# Altium PCB Thruster Driver Board.PcbDoc (part 2 of 2)
Units mil, origin at the board's own origin, x right, y up, seen from the top; angles counter-clockwise.
Board outline 7035 x 3025 mil, 4 copper layers (Top Layer, Ground Plane, Power Plane, Bottom Layer); 146 components, 107 nets, 533 pads, 443 vias.
Unrouted connection lines stored in the file: 1.
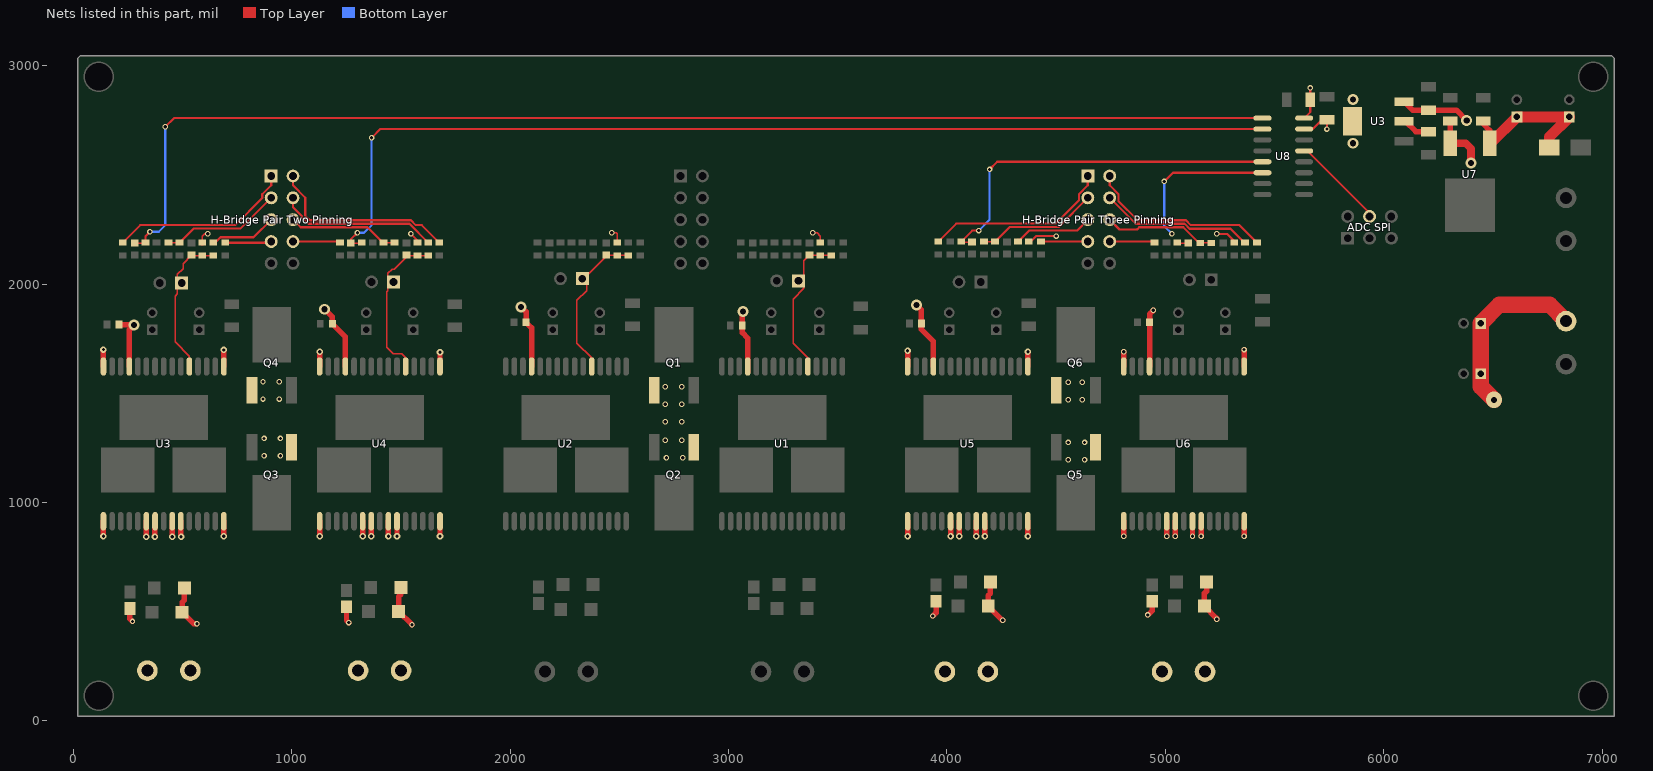
[diagram p4: the nets of this part, all layers, seen from the top]

## Via types
v1: diameter 25, hole 15, Top Layer to Bottom Layer, 371 vias
v2: diameter 30, hole 15, Top Layer to Bottom Layer, 45 vias
v3: diameter 50, hole 28, Top Layer to Bottom Layer, 26 vias
v4: diameter 75, hole 28, Top Layer to Bottom Layer, 1 vias

## Nets (pads, with @x,y where several pads share a name; then routed paths per layer and width w, separated by ;. In a path a pad name is that pad's centre, name@x,y a point inside that pad or via, vN(x,y) a via of type N, cw(c..) or ccw(c..) an arc to the next point about the centre after c; other vN are vias at no path point) (continued)
P2_M1_CURRENT_SENSE: C10.2 R24.1 U8.1 | length 5683.1
  Top Layer w6: C10.2@280,2187.56 328.03,2187.56 R24.1@330,2189.53
  Top Layer w10: R24.1@330,2189.53 330,2220 v1(350,2240) ; v1(420,2720) 460,2760 U8.1@5444.53,2760
  Bottom Layer w10: v1(350,2240) 390,2240 420,2270 v1(420,2720)
P2_M1ENA/B: "H-Bridge Pair Two Pinning.5" R20.1 | length 308.7
  Top Layer w10: R20.1@640,2189.53 647.95,2189.53 672.73,2214.31 824.31,2214.31 905,2295
P2_M1INA: "H-Bridge Pair Two Pinning.7" R21.1 | length 212.3
  Top Layer w10: R21.1@695,2189.53 899.53,2189.53 905,2195
P2_M1INB: "H-Bridge Pair Two Pinning.1" R22.1 | length 841.7
  Top Layer w10: R22.1@225,2189.53 305.47,2270 740,2270 864.47,2394.47 864.47,2411.79 905,2452.31 905,2495
P2_M1OUTA: D5.2 D6.1 J8.1 U3.1@688.2,1622.67 U3.24 U3.25 U3.30 | length 488.6
  Top Layer w25: U3.24@451.98,914.01 451.98,843.97 v2(452.61,843.34) ; v2@491.35,844.6 U3.25@491.35,914.01 ; D6.1@507.24,607.39 507.24,552.24 497.24,542.24 D5.2@497.24,497.39 549.62,445 v1(565,445) ; v2(688.2,845) U3.30@688.2,914.01 ; U3.1@688.2,1622.67 v2(688.2,1698.34)
  other v2: 492.61,843.34
P2_M1OUTB: J8.2 R27.1 U3.15 U3.16 U3.21 U3.22 | length 354.2
  Top Layer w25: v2(137.02,845) U3.16@137.02,914.01 ; U3.15@137.02,1622.67 v2(137.02,1700) ; R27.1@258.34,514.98 258.34,466.66 v1(270,455) ; v2(332.61,843.34) 333.87,844.6 U3.21@333.87,914.01 ; v2@373.24,843.97 v2(372.61,843.34) 372.61,913.38 U3.22@373.24,914.01
P2_M1PWM: "H-Bridge Pair Two Pinning.3" R23.1 R25.2 | length 555.1
  Top Layer w6: R23.1@435,2189.53 R25.2@485,2189.53
  Top Layer w10: R25.2@485,2189.53 549.47,2254 764,2254 905,2395
P2_M2_CURRENT_SENSE: C15.2 R34.1 U8.2 | length 4686.3
  Top Layer w6: C15.2@1270,2187.56 1318.03,2187.56 R34.1@1320,2189.53
  Top Layer w10: C15.2@1270,2187.56 1270,2205 v1(1300,2235) ; v1(1365,2670) 1405,2710 U8.2@5444.53,2710
  Bottom Layer w10: v1(1300,2235) 1330,2235 1365,2270 v1(1365,2670)
P2_M2ENA/B: "H-Bridge Pair Two Pinning.4" R29.1 | length 733
  Top Layer w10: 1005,2395 1005,2352.31 1045.53,2311.79 1045.53,2306.85 1076.37,2276 1538.53,2276 R29.1@1625,2189.53
P2_M2INA: "H-Bridge Pair Two Pinning.2" R30.1 | length 869.8
  Top Layer w10: 1005,2495 1005,2452.31 1061.53,2395.79 1061.53,2313.47 1083,2292 1545.16,2292 1567.16,2270 1594.53,2270 R30.1@1675,2189.53
P2_M2INB: "H-Bridge Pair Two Pinning.8" R31.1 | length 217.3
  Top Layer w10: 1005,2195 1214.53,2195 R31.1@1220,2189.53
P2_M2OUTA: D7.2 D8.1 J9.1 U4.1 U4.24 U4.25 U4.30 | length 472.8
  Top Layer w25: v2(1441.98,845) U4.24@1441.98,914.01 ; v2(1481.35,845) U4.25@1481.35,914.01 ; D8.1@1498.9,610 1498.9,578.9 1488.9,568.9 D7.2@1488.9,500 1548.9,440 v1(1550,440) ; v2(1678.2,845) U4.30@1678.2,914.01 ; U4.1@1678.2,1622.67 v2(1678.2,1688.34)
P2_M2OUTB: J9.2 R36.1 U4.15 U4.16 U4.21 U4.22 | length 351.1
  Top Layer w25: v2(1127.02,845) U4.16@1127.02,914.01 ; U4.15@1127.02,1622.67 v2(1127.02,1690) ; R36.1@1250,522.6 1250,460 v1(1260,450) ; v2(1323.87,845) U4.21@1323.87,914.01 ; v2(1363.24,845) U4.22@1363.24,914.01
P2_M2PWM: "H-Bridge Pair Two Pinning.6" R32.1 R33.2 | length 508.7
  Top Layer w6: R32.1@1420,2189.53 R33.2@1470,2189.53
  Top Layer w10: 1005,2295 1040,2260 1346.58,2260 1417.05,2189.53 R32.1@1420,2189.53
P3_M1_CURRENT_SENSE: C20.2 R42.1 U8.5 | length 1716.5
  Top Layer w6: R42.1@4065,2194.53 4066.97,2192.56 C20.2@4115,2192.56
  Top Layer w10: R42.1@4065,2194.53 4115.47,2245 v1(4145,2245) ; v1(4195,2525) 4230,2560 U8.5@5444.53,2560
  Bottom Layer w10: v1(4145,2245) 4195,2295 v1(4195,2525)
P3_M1ENA/B: "H-Bridge Pair Three Pinning.5" R38.1 | length 370.3
  Top Layer w10: R38.1@4325,2203.23 R38.1@4325,2194.53 4375.47,2245 4595,2245 4645,2295
P3_M1INA: "H-Bridge Pair Three Pinning.7" R39.1 | length 215.2
  Top Layer w10: R39.1@4430,2194.53 4430.47,2195 4645,2195
P3_M1INB: "H-Bridge Pair Three Pinning.1" R40.1 | length 850.5
  Top Layer w10: R40.1@3960,2194.53 4042.47,2277 4497,2277 4604.47,2384.47 4604.47,2411.79 4645,2452.31 4645,2495
P3_M1OUTA: D9.2 D10.1 J11.2 U5.1 U5.24 U5.25 U5.30 | length 481.5
  Top Layer w25: v2(4134.37,845) U5.24@4134.37,914.01 ; v2(4173.74,845) U5.25@4173.74,914.01 ; D10.1@4198.9,635 4198.9,583.9 4188.9,573.9 D9.2@4188.9,525 4253.9,460 v1(4255,460) ; v2(4370.59,845) U5.30@4370.59,914.01 ; U5.1@4370.59,1622.67 v2(4370.59,1690)
P3_M1OUTB: J11.1 R45.1 U5.15 U5.16 U5.21 U5.22 | length 353.2
  Top Layer w25: v2(3819.41,845) U5.16@3819.41,914.01 ; U5.15@3819.41,1622.67 v2(3819.41,1695) ; v1(3935,480) 3950,495 R45.1@3950,547.6 ; v2(4016.26,845) U5.21@4016.26,914.01 ; v2(4055.63,845) U5.22@4055.63,914.01
P3_M1PWM: "H-Bridge Pair Three Pinning.3" R41.1 R43.2 | length 566
  Top Layer w6: R41.1@4170,2194.53 R43.2@4220,2194.53
  Top Layer w10: R43.2@4227.95,2194.53 R43.2@4220,2194.53 4286.47,2261 4511,2261 4645,2395
P3_M2_CURRENT_SENSE: C25.2 R51.1 U8.6 | length 768.6
  Top Layer w6: R51.1@5056.97,2187.56 C25.2@5105,2187.56
  Top Layer w10: v1(4995,2470) 5035,2510 U8.6@5444.53,2510
  Bottom Layer w10: v1(4995,2470) 4995,2265 v1(5030,2230)
P3_M2ENA/B: "H-Bridge Pair Three Pinning.4" R47.1 | length 705.1
  Top Layer w10: 4745,2395 4864,2276 5088.21,2276 5110.71,2253.5 5298.08,2253.5 5362.05,2189.53 R47.1@5365,2189.53
P3_M2INA: "H-Bridge Pair Three Pinning.2" R48.1 | length 845.5
  Top Layer w10: 4745,2495 4745,2452.31 4785.53,2411.79 4785.53,2379.47 4873,2292 5094.83,2292 5116.83,2270 5339.53,2270 R48.1@5420,2189.53
P3_M2INB: "H-Bridge Pair Three Pinning.8" R49.1 | length 207.3
  Top Layer w10: 4745,2195 4944.53,2195 R49.1@4950,2189.53
P3_M2OUTA: D11.2 D12.1 J10.2 U6.1 U6.24 U6.25 U6.30 | length 481.7
  Top Layer w25: v1(5124.37,845) U6.24@5124.37,914.01 ; v1(5163.74,845) U6.25@5163.74,914.01 ; D12.1@5188.9,635 5188.9,593.9 5178.9,583.9 D11.2@5178.9,525 5235,468.9 v1(5235,465) ; v1(5360.59,845) U6.30@5360.59,914.01 ; U6.1@5360.59,1622.67 v1(5360.59,1700)
P3_M2OUTB: J10.1 R54.1 U6.15 U6.16 U6.21 U6.22 | length 344.6
  Top Layer w25: U6.15@4809.41,1622.67 v1(4809.41,1690) ; v1(4810,845) U6.16@4810,913.42 ; v1(4920,485) 4940,505 R54.1@4940,547.6 ; v1(5006.26,845) U6.21@5006.26,914.01 ; v1(5045.63,845) U6.22@5045.63,914.01
P3_M2PWM: "H-Bridge Pair Three Pinning.6" R50.1 R52.2 | length 517.2
  Top Layer w6: R50.1@5160,2189.06 R52.2@5210,2189.06
  Top Layer w10: 4745,2295 4790,2250 4869.75,2250 4879.75,2260 5081.58,2260 5152.52,2189.06 R50.1@5160,2189.06
SCK: "ADC SPI.4" U8.13 | length 434.6
  Top Layer w6: U8.13@5635.47,2610 5650,2610 5940,2320 5940,2310
U1_ENA_DIAGA: C35.2 P1.1 R1.1 R2.2 U1.5 | length 690.4
  Top Layer w6: U1.5@3363.11,1599.33 3363.11,1661.89 3295,1730 3295,1930 3345,1980 3345,2107.44 C35.2@3370,2132.44 R2.2@3468.03,2132.44
U2_ENA_DIAGA: C36.2 P2.1 R10.1 R11.2 U2.5 | length 731.5
  Top Layer w6: P2.1@2330,2000 P2.1@2330,2025 ; U2.5@2373.11,1609.33 2373.11,1661.89 2305,1730 2305,1925 2350,1970 2350,2038.5 2440,2128.5 C36.2@2440,2132.44 ; C36.2@2441.97,2130.47 2443.5,2132 2538.47,2132 R11.2@2540,2130.47
U3_ENA_DIAGA: C37.2 P3.1 R19.1 R20.2 U3.5 | length 694.8
  Top Layer w6: P3.1@495,2005 P3.1@476.06,1986.06 ; U3.5@529.39,1624 U3.5@530.72,1622.67 530.72,1669.28 465,1735 465,1945 476.06,1956.06 P3.1@476.06,1986.06 ; C37.2@540,2132.44 501.5,2093.94 501.5,2070.44 476.06,2045 P3.1@476.06,1986.06 ; C37.2@541.97,2130.47 R20.2@640,2130.47
U4_ENA_DIAGA: C38.2 P4.1 R28.1 R29.2 U4.5 | length 726.3
  Top Layer w6: U4.5@1520.72,1612.67 1520.72,1662.31 1503.03,1680 1465,1680 1435,1710 1435,1965 1440,1970 1440,2050 1458.5,2068.5 1468.91,2068.5 C38.2@1525,2124.59 ; C38.2@1525,2120 C38.2@1525,2124.59 ; R29.2@1625,2130.47 1526.97,2130.47 C38.2@1525,2132.44 C38.2@1525,2124.59
VCC_IN: C2.2 C6.2 C11.2 C16.2 C21.2 C26.2 C45.1 C46.1 J12.1 Q1.1 Q2.1 Q3.1 Q4.1 Q5.1 Q6.1 U1.12 U2.12 U3.12 U4.12 U5.12 U6.12 | length 2562.5
  Top Layer w25: C11.2@207.56,1815 209.22,1813.34 v3(277.61,1813.34) 255.13,1790.86 U3.12@255.13,1622.67 ; v3(1150,1885) 1185.17,1849.83 C16.2@1185.17,1818.34 1245.13,1758.38 U4.12@1245.13,1622.67 ; v3(2050,1895) 2072.56,1872.44 C6.2@2072.56,1825 2097.52,1800.04 U2.12@2097.52,1622.67 ; v3(3065,1875) 3062.56,1872.56 C2.2@3062.56,1810 3062.56,1777.48 3087.52,1752.52 U1.12@3087.52,1622.67 U1.12@3087.52,1599.33 ; v3(3860,1905) 3882.56,1882.44 C21.2@3882.56,1820 3882.56,1792.44 3937.52,1737.48 U5.12@3937.52,1622.67 ; U6.12@4927.52,1622.67 4927.56,1622.71 C26.2@4927.56,1825 4927.56,1862.56 v1(4945,1880)
  Top Layer w75: v4(6505,1470) 6444.37,1530.63 C46.1@6444.37,1590 C45.1@6444.37,1820 6529.37,1905 6760,1905 J12.1@6835,1830
  other v1: 4555,1195 4630,1195 2715,1205 2790,1205 872.61,1213.34 947.61,1213.34 4555,1275 4630,1275 2710,1285 2785,1285 872.61,1293.34 947.61,1293.34 2710,1370 2785,1370 2710,1450 2785,1450 4555,1470 4620,1470 867.61,1473.34 942.61,1473.34 2710,1530 2785,1530 4555,1550 4620,1550 867.61,1553.34 942.61,1553.34
VDD: C44.2 C47.2 R1.2 R10.2 R19.2 R28.2 R37.2 R46.2 U3.3@6093.11,2835.55 U7.3 | length 1077.6
  Top Layer w6: R19.2@590,2189.53 590,2220 600,2230 v1(615,2230) ; v1(1545,2230) 1575,2200 R28.2@1575,2189.53 ; v1(2465,2235) 2485,2235 2490,2230 R10.2@2490,2189.53 ; v1(3385,2235) 3405,2235 3420,2220 R1.2@3420,2189.53
  Top Layer w10: R37.2@4375,2194.53 4382.95,2194.53 4408.42,2220 v1(4500,2220) ; v1(5235,2230) 5282.19,2230 R46.2@5315,2197.19 ; U7.3@6304.45,2645 U7.3@6305,2645.55
  Top Layer w25: R19.2@590,2189.53 R19.2@591,2190.53 ; U3.3@6093.11,2835.55 6131.81,2796.85 C47.2@6205,2796.85 6333.15,2796.85 v3(6380,2750) ; U7.3@6305,2645.55 C44.2@6305,2746.85
  Top Layer w35: U7.3@6304.45,2645 6375,2645 6400,2620 v3(6400,2555)
VDD_3.3: C48.2 C53.1 C54.1 U3.2@6093.11,2745 U3.4@5856.89,2745 U8.15 U8.16 | length 447.2
  Top Layer w10: U8.15@5635.47,2710 5675,2710 5716.85,2751.85 C54.1@5740,2751.85 v1(5740,2710) ; U8.16@5635.47,2760 5663.15,2787.68 C53.1@5663.15,2845 v1(5663.15,2898.15) v1@5665,2900
  Top Layer w25: U3.2@6093.11,2745 6100,2745 6146.85,2698.15 C48.2@6205,2698.15
  other v3: 5860,2645 5860,2845
VDD_12V: C43.2 C49.1 C50.1 D13.1 U7.1 | length 707.6
  Top Layer w25: C43.2@6455,2746.85 6455,2735 6485.55,2704.45 U7.1@6485.55,2645
  Top Layer w50: U7.1@6485.55,2645 6489.37,2645 C49.1@6610,2765.63 C50.1@6850,2765.63 6758.15,2673.78 D13.1@6758.15,2625
pads on no net: "ADC SPI.5" U1.6 U2.6 U3.6 U4.6 U5.6 U6.6 U8.7 U8.8

## Polygon pours and split planes (outlines as drawn)
GND on Bottom Layer "Power Plane-No Net" (solid, remove dead copper, pour order 62): 0,0 7075,0 7075,3065 0,3065 0,0
NetQ6_4 on Bottom Layer "Power Plane-No Net" (solid, pour order 63): 4500,1905 4500,1635 4685,1635 4685,1750 4885,1750 4885,1665 4960,1665 4960,1905
P2_M2OUTA on Bottom Layer "Power Plane-No Net" (solid, remove dead copper, pour order 43): 1405,1740 1410,10 1810,10 1810,1410 1740,1410 1740,1740
P3_M2OUTA on Bottom Layer "Power Plane-No Net" (solid, remove dead copper, pour order 44): 5086.85,1740 5091.85,10 5491.85,10 5491.85,1410 5410,1410 5410,1740
NetQ4_4 on Bottom Layer "Power Plane-No Net" (solid, pour order 64): 825,1905 825,1640 1025,1640 1025,1750 1235,1750 1235,1665 1325,1665 1325,1905
P1_M1OUTA on Bottom Layer "Power Plane-No Net" (solid, remove dead copper, pour order 45): 3250,1740 3255,10 3655,10 3655,1410 3604.17,1410 3605,1740
NetQ1_4 on Bottom Layer "Power Plane-No Net" (solid, pour order 65): 2660,1900 2660,1640 2855,1640 2855,1745 3065,1745 3065,1640 3150,1640 3150,1900
NetQ2_4 on Bottom Layer "Power Plane-No Net" (solid, pour order 66): 2839.29,863.34 2659.29,863.34 2660,1415 2555,1415 2555,1765 2270,1765 2270,1575 2110,1575 2109.29,1578.34 2109.29,1998.34 2644.29,1998.34 2649.29,2003.34 2654.29,1998.34 2654.29,1628.34 2659.29,1623.34 2839.29,1623.34
P1_M2OUTA on Bottom Layer "Power Plane-No Net" (solid, remove dead copper, pour order 46): 2255,1740 2260,10 2635,10 2635,1410 2565,1410 2565,1740
P1_M2OUTB on Bottom Layer "Power Plane-No Net" (solid, remove dead copper, pour order 40): 2245,10 1870,10 1870,1740 2090,1740 2090,1565 2245,1565
P2_M2OUTB on Bottom Layer "Power Plane-No Net" (solid, remove dead copper, pour order 37): 1395,10 1020,10 1020,1740 1230,1740 1230,1520 1395,1520
P2_M1OUTB on Bottom Layer "Power Plane-No Net" (solid, remove dead copper, pour order 41): 405,10 30,10 30,1740 240,1740 240,1555 405,1555
P3_M1OUTA on Bottom Layer "Power Plane-No Net" (solid, remove dead copper, pour order 47): 4091.85,1740 4096.85,10 4471.85,10 4471.85,1410 4455,1410 4455,1740
NetQ5_4 on Bottom Layer "Power Plane-No Net" (solid, pour order 67): 4681.86,855.56 4501.86,855.56 4501.86,1420.56 4496.86,1425.56 4455,1425 4455,1755 4445,1755 4091.86,1755.56 4091.86,1565.56 3956.86,1565.56 3951.86,1570.56 3951.86,1990.56 4486.86,1990.56 4491.86,1995.56 4496.86,1990.56 4496.86,1620.56 4501.86,1615.56 4681.86,1615.56
P3_M1OUTB on Bottom Layer "Power Plane-No Net" (solid, remove dead copper, pour order 42): 4081.85,10 3706.85,10 3706.85,1740 3891.85,1740 3891.85,1525 4081.85,1525
P3_M2OUTB on Bottom Layer "Power Plane-No Net" (solid, remove dead copper, pour order 38): 5076.85,10 4701.85,10 4701.85,1740 4886.85,1740 4886.85,1525 5076.85,1525
P1_M1OUTB on Bottom Layer "Power Plane-No Net" (solid, remove dead copper, pour order 39): 3240,10 2865,10 2865,1740 3050,1740 3050,1525 3240,1525
NetQ3_4 on Bottom Layer "Power Plane-No Net" (solid, pour order 68): 997.61,868.34 817.61,868.34 817.61,1433.34 812.61,1438.34 727.61,1438.34 727.61,1773.34 722.61,1768.34 407.61,1768.34 407.61,1578.34 272.61,1578.34 267.61,1583.34 267.61,2003.34 802.61,2003.34 807.61,2008.34 812.61,2003.34 812.61,1633.34 817.61,1628.34 997.61,1628.34
P2_M1OUTA on Bottom Layer "Power Plane-No Net" (solid, remove dead copper, pour order 48): 415,1740 420,10 795,10 795,1410 730,1410 730,1740
GND on Top Layer "Power Plane-No Net" (solid, remove dead copper, pour order 61): 0,0 100,0 7075,0 7075,3065 7010,3065 0,3065 0,0
VDD_3.3 on Top Layer "Power Plane-No Net" (solid, remove dead copper, pour order 35): 5805,2890 5805,2605 6145,2605 6145,2890 5805,2890
no net on Top Layer "Power Plane-No Net" (solid, remove dead copper, pour order 36): 5820,2880 5820,2595 6160,2595 6160,2880 5820,2880
NetC27_1 on Top Layer "Power Plane-No Net" (solid, remove dead copper, pour order 55): 4725.15,1595 4720.15,1590 4645.15,1590 4645.15,1435 4700.15,1435 4700.15,1340 4870.15,1340 4870.15,1495 4905.15,1495 5340.43,1494.62 5340,1645 5255,1645 5255.43,1564.62 4905.43,1564.62 4905.43,1634.62 4905,1645 4825,1645 4825.15,1595
NetC22_1 on Top Layer "Power Plane-No Net" (solid, remove dead copper, pour order 58): 4530,1160 4385,1160 4385,1280 4305,1280 4305,1495 3835,1495 3835,1650 3920,1650 3920,1575 4270,1575 4270,1655 4350,1655 4350,1520 4435,1520 4435,1420 4530,1420
NetC7_1 on Top Layer "Power Plane-No Net" (solid, remove dead copper, pour order 59): 2695,1160 2550,1160 2550,1280 2470,1280 2470,1495 2000,1495 2000,1650 2085,1650 2085,1575 2435,1575 2435,1655 2510,1655 2510,1520 2600,1520 2600,1420 2695,1420
NetC3_1 on Top Layer "Power Plane-No Net" (solid, remove dead copper, pour order 56): 2885.15,1595 2880.15,1590 2805.15,1590 2805.15,1435 2860.15,1435 2860.15,1340 3030.15,1340 3030.15,1495 3065.15,1495 3500.43,1494.62 3500,1645 3415,1645 3415.43,1564.62 3065.43,1564.62 3065.43,1634.62 3065,1645 2985,1645 2985.15,1595
NetC17_1 on Top Layer "Power Plane-No Net" (solid, remove dead copper, pour order 57): 1045.15,1595 1040.15,1590 965.15,1590 965.15,1435 1020.15,1435 1020.15,1340 1190.15,1340 1190.15,1495 1225.15,1495 1660.43,1494.62 1660,1645 1575,1645 1575.43,1564.62 1225.43,1564.62 1225.43,1634.62 1225,1645 1145,1645 1145.15,1595
NetC12_1 on Top Layer "Power Plane-No Net" (solid, remove dead copper, pour order 60): 850,1160 705,1160 705,1280 625,1280 625,1495 155,1495 155,1650 240,1650 240,1575 590,1575 590,1655 665,1655 665,1520 755,1520 755,1420 850,1420
VCC_IN on Top Layer "Power Plane-No Net" (solid, remove dead copper, pour order 53): 2610,1430 2810,1430 2810,1600 2610,1600 2610,1430
VCC_IN on Top Layer "Power Plane-No Net" (solid, remove dead copper, pour order 50): 4733.34,1313.34 4533.34,1313.34 4533.34,1143.34 4733.34,1143.34 4733.34,1313.34
VCC_IN on Top Layer "Power Plane-No Net" (solid, remove dead copper, pour order 49): 4455.19,1415 4655.19,1415 4655.19,1585 4455.19,1585 4455.19,1415
VCC_IN on Top Layer "Power Plane-No Net" (solid, remove dead copper, pour order 51): 2890,1325 2690,1325 2690,1155 2890,1155 2890,1325
VCC_IN on Top Layer "Power Plane-No Net" (solid, remove dead copper, pour order 52): 1044.28,1331.68 844.28,1331.68 844.28,1161.68 1044.28,1161.68 1044.28,1331.68
VCC_IN on Top Layer "Power Plane-No Net" (solid, remove dead copper, pour order 54): 767.61,1433.34 967.61,1433.34 967.61,1603.34 767.61,1603.34 767.61,1433.34
GND on Ground Plane (split plane): 7034.9,40.1 40.1,40.1 40.1,3024.9 7034.9,3024.9
no net on Power Plane (split plane): 6841.44,1895.37 6847.82,1894.43 6854.07,1892.86 6860.14,1890.69 6865.97,1887.93 6871.5,1884.62 6876.67,1880.78 6881.45,1876.45 6885.78,1871.67 6889.62,1866.5 6892.93,1860.97 6895.69,1855.14 6897.86,1849.07 6899.43,1842.82 6900.37,1836.44 6900.69,1830 6900.37,1823.56 6899.43,1817.18 6897.86,1810.93 6895.69,1804.86 6892.93,1799.03 6889.62,1793.5 6885.78,1788.33 6881.45,1783.55 6876.67,1779.22 6871.5,1775.38 6865.97,1772.07 6860.14,1769.31 6854.07,1767.14 6847.82,1765.57 6841.44,1764.63 6835,1764.31 6828.56,1764.63 6822.18,1765.57 6815.93,1767.14 6809.86,1769.31 6804.03,1772.07 6798.5,1775.38 6793.33,1779.22 6788.55,1783.55 6784.22,1788.33 6780.38,1793.5 6777.07,1799.03 6774.31,1804.86 6772.14,1810.93 6770.57,1817.18 6769.63,1823.56 6769.31,1830 6769.63,1836.44 6770.57,1842.82 6772.14,1849.07 6774.31,1855.14 6777.07,1860.97 6780.38,1866.5 6784.22,1871.67 6788.55,1876.45 6793.33,1880.78 6798.5,1884.62 6804.03,1887.93 6809.86,1890.69 6815.93,1892.86 6822.18,1894.43 6828.56,1895.37 6835,1895.69
no net on Power Plane (split plane): 6479.27,1784.1 6409.47,1784.1 6409.47,1855.9 6479.27,1855.9
no net on Power Plane (split plane): 6479.27,1554.1 6409.47,1554.1 6409.47,1625.9 6479.27,1625.9
VDD_3.3 on Power Plane (split plane): 6149.9,2575.1 5757.11,2575.1 5698.6,2633.6 5696.95,2634.71 5695,2635.1 5505.1,2635.1 5505.1,2787.89 5538.6,2821.4 5539.71,2823.05 5540.1,2825 5540.1,2934.9 6149.9,2934.9
NetC27_1 on Power Plane (split plane): 5484.9,1752.11 5472.89,1740.1 5385,1740.1 5383.05,1739.71 5381.4,1738.6 5361.4,1718.6 5360.29,1716.95 5359.9,1715 5359.9,930.1 4830.1,930.1 4830.1,1315 4829.71,1316.95 4828.6,1318.6 4826.95,1319.71 4825,1320.1 4715.1,1320.1 4715.1,1564.9 4825,1564.9 4826.95,1565.29 4828.6,1566.4 4829.71,1568.05 4830.1,1570 4830.1,1759.9 5020,1759.9 5021.95,1760.29 5023.6,1761.4 5024.71,1763.05 5025.1,1765 5025.1,1854.9 5484.9,1854.9
NetC22_1 on Power Plane (split plane): 4464.9,1742.11 4452.89,1730.1 4365,1730.1 4363.05,1729.71 4361.4,1728.6 4341.4,1708.6 4340.29,1706.95 4339.9,1705 4339.9,1490 4340.29,1488.05 4341.4,1486.4 4343.05,1485.29 4345,1484.9 4459.9,1484.9 4459.9,1115.1 4345,1115.1 4343.05,1114.71 4341.4,1113.6 4340.29,1111.95 4339.9,1110 4339.9,930.1 3840.1,930.1 3840.1,1759.9 3965,1759.9 3966.95,1760.29 3968.6,1761.4 3969.71,1763.05 3970.1,1765 3970.1,1844.9 4464.9,1844.9
P3_M2OUTB on Power Plane (split plane): 4819.9,925 4820.29,923.05 4821.4,921.4 4823.05,920.29 4825,919.9 5081.75,919.9 5081.75,40.1 4700.1,40.1 4700.1,959.9 4819.9,959.9
P3_M1OUTA on Power Plane (split plane): 4474.9,40.1 4100.1,40.1 4100.1,919.9 4345,919.9 4346.95,920.29 4348.6,921.4 4349.71,923.05 4350.1,925 4350.1,959.9 4474.9,959.9
P3_M2OUTA on Power Plane (split plane): 5494.9,40.1 5091.95,40.1 5091.95,919.9 5365,919.9 5366.95,920.29 5368.6,921.4 5369.71,923.05 5370.1,925 5370.1,959.9 5494.9,959.9
P1_M1OUTA on Power Plane (split plane): 3649.9,40.1 3250.1,40.1 3250.1,919.9 3520,919.9 3521.95,920.29 3523.6,921.4 3524.71,923.05 3525.1,925 3525.1,954.9 3649.9,954.9
NetC3_1 on Power Plane (split plane): 3645,1742.21 3627.89,1725.1 3540,1725.1 3538.05,1724.71 3536.4,1723.6 3516.4,1703.6 3515.29,1701.95 3514.9,1700 3514.9,930.1 2995.1,930.1 2995.1,1315 2994.71,1316.95 2993.6,1318.6 2991.95,1319.71 2990,1320.1 2880.1,1320.1 2880.1,1564.9 2990,1564.9 2991.95,1565.29 2993.6,1566.4 2994.71,1568.05 2995.1,1570 2995.1,1759.9 3135,1759.9 3136.95,1760.29 3138.6,1761.4 3139.71,1763.05 3140.1,1765 3140.1,1839.9 3645,1839.9
P3_M1OUTB on Power Plane (split plane): 3829.9,925 3830.29,923.05 3831.4,921.4 3833.05,920.29 3835,919.9 4089.9,919.9 4089.9,40.1 3705.1,40.1 3705.1,954.9 3829.9,954.9
NetC7_1 on Power Plane (split plane): 2614.9,1730.1 2530,1730.1 2528.05,1729.71 2526.4,1728.6 2506.4,1708.6 2505.29,1706.95 2504.9,1705 2504.9,1515 2505.29,1513.05 2506.4,1511.4 2508.05,1510.29 2510,1509.9 2624.9,1509.9 2624.9,1115.1 2510,1115.1 2508.05,1114.71 2506.4,1113.6 2505.29,1111.95 2504.9,1110 2504.9,940.1 2005.1,940.1 2005.1,1759.9 2145,1759.9 2146.95,1760.29 2148.6,1761.4 2149.71,1763.05 2150.1,1765 2150.1,1844.9 2614.9,1844.9
VDD on Power Plane (split plane): 7034.9,2200.1 40.1,2200.1 40.1,3024.9 7034.9,3024.9
P1_M2OUTB on Power Plane (split plane): 1994.9,935 1995.29,933.05 1996.4,931.4 1998.05,930.29 2000,929.9 2249.9,929.9 2249.9,40.1 1875.1,40.1 1875.1,959.9 1994.9,959.9
NetC17_1 on Power Plane (split plane): 1789.9,1737.11 1777.89,1725.1 1690,1725.1 1688.05,1724.71 1686.4,1723.6 1666.4,1703.6 1665.29,1701.95 1664.9,1700 1664.9,940.1 1152.71,940.1 1152.71,1333.34 1152.32,1335.29 1151.22,1336.94 1149.57,1338.05 1147.61,1338.44 1145.66,1338.05 1145.11,1337.68 1144.57,1338.05 1142.61,1338.44 1027.71,1338.44 1027.71,1583.24 1147.61,1583.24 1149.57,1583.63 1151.22,1584.73 1152.32,1586.39 1152.71,1588.34 1152.71,1748.24 1270,1748.24 1271.95,1748.63 1273.6,1749.73 1274.71,1751.39 1275.1,1753.34 1275.1,1838.24 1789.9,1838.24
NetC12_1 on Power Plane (split plane): 784.9,1780 784.9,1725.1 775,1725.1 773.05,1724.71 771.4,1723.6 754.01,1706.22 752.9,1704.57 752.52,1702.61 752.52,1438.34 752.9,1436.39 754.01,1434.73 755.66,1433.63 757.61,1433.24 792.52,1433.24 792.52,1188.44 667.61,1188.44 665.66,1188.05 664.01,1186.94 662.9,1185.29 662.52,1183.34 662.52,950.1 155.1,950.1 155.1,1748.24 320,1748.24 321.95,1748.63 323.6,1749.73 324.71,1751.39 325.1,1753.34 325.1,1838.34 784.9,1838.34
P2_M1OUTB on Power Plane (split plane): 144.9,945 145.29,943.05 146.4,941.4 148.05,940.29 150,939.9 407.52,939.9 407.52,40.1 40.1,40.1 40.1,969.9 144.9,969.9
P1_M1OUTB on Power Plane (split plane): 2984.9,925 2985.29,923.05 2986.4,921.4 2988.05,920.29 2990,919.9 3239.9,919.9 3239.9,40.1 2870.1,40.1 2870.1,954.9 2984.9,954.9
VCC_IN on Power Plane (split plane): 320 vertices, not listed, extent 40.1,40.1 7034.9,2189.9
P1_M2OUTA on Power Plane (split plane): 2629.9,40.1 2260.1,40.1 2260.1,929.9 2510,929.9 2511.95,930.29 2513.6,931.4 2514.71,933.05 2515.1,935 2515.1,954.9 2629.9,954.9
P2_M2OUTB on Power Plane (split plane): 1142.52,935 1142.9,933.05 1144.01,931.4 1145.66,930.29 1147.61,929.9 1397.52,929.9 1397.52,40.1 1020.1,40.1 1020.1,959.9 1142.52,959.9
P2_M1OUTA on Power Plane (split plane): 789.9,40.1 417.71,40.1 417.71,939.9 667.61,939.9 669.57,940.29 671.22,941.4 672.32,943.05 672.71,945 672.71,969.9 789.9,969.9
P2_M2OUTA on Power Plane (split plane): 1804.9,957.89 1804.9,40.1 1407.71,40.1 1407.71,929.9 1670,929.9 1671.95,930.29 1673.6,931.4 1674.71,933.05 1675.1,935 1675.1,959.9 1802.89,959.9

## Other copper
Power Plane (plane layer: these items are gaps in the copper):
  circle w10: c6835,1830 r70.71
  lines w10: 15,975 150,975 ; 20,2195 7050,2195 ; 412.61,7.39 412.61,945 ; 667.61,975 795,975 795,10 ; 790,1840 790,1780 790,1720 775,1720 757.61,1702.61 757.61,1438.34 797.61,1438.34 797.61,1183.34 667.61,1183.34 667.61,945 150,945 150,1753.34 320,1753.34 320,1843.44 717.61,1843.44 790,1843.44 ; 1010,15 1015,20 1015,965 1147.61,965 ; 1142.61,1333.34 1022.61,1333.34 1022.61,1588.34 1147.61,1588.34 1147.61,1753.34 ; 1147.61,1333.34 1147.61,935 1670,935 1670,1700 1690,1720 1780,1720 1795,1735 1795,1843.34 1640,1843.34 ; 1147.61,1633.34 1147.61,1753.34 ; 1400,935 1402.61,932.39 1402.61,17.39 1405,15 ; 1647.61,1843.34 1270,1843.34 1270,1753.34 1147.61,1753.34 ; 1670,965 1805,965 1810,960 1810,20 ; 1865,15 1870,20 1870,965 2000,965 ; 2255,20 2255,935 ; 2480,1850 2620,1850 2620,1725 2530,1725 2510,1705 2510,1515 2630,1515 2630,1110 ; 2510,960 2635,960 2635,20 ; 2510,1850 2145,1850 2145,1765 2000,1765 2000,935 2510,935 2510,1110 2630,1110 ; 2625,1105 2630,1110 ; 2870,15 2865,20 2865,960 2875,960 2990,960 ; 3245,20 3245,925 ; 3490,1845 3650.1,1845 3650.1,1740.1 3630,1720 3540,1720 3520,1700 3520,925 2990,925 2990,1315 2875.29,1315 2875,1315.29 2875,1570 2990,1570 2990,1765 3135,1765 3135,1845 3500,1845 ; 3520,960 3655,960 3655,10 ; 3700,20 3700,960 3835,960 ; 4095,20 4095,925 ; 4315,1850 4470,1850 4470,1740 4455,1725 4365,1725 4345,1705 4345,1490 4465,1490 4465,1110 ; 4345,965 4480,965 4480,20 ; 4345,1850 3965,1850 3965,1765 3835,1765 3835,925 4345,925 4345,1110 4465,1110 ; 4460,1105 4465,1110 ; 4700,20 4695,25 4695,965 4825,965 4825,970 ; 4710,1315.29 4710,1570 4825,1570 4825,1765 5020,1765 5020,1860 5335,1860 5490,1860 5490,1750 5475,1735 5385,1735 5365,1715 5365,925 4825,925 4825,1315 4710.29,1315 ; 5085,20 5086.85,21.85 5086.85,925 ; 5365,965 5490,965 5500,965 5500,20 ; 5500,2630 5695,2630 5755,2570 6155,2570 6155,2940 5535,2940 5535,2825 5500,2790 5500,2630 ; 6404.37,1549 6404.37,1631 6484.37,1631 6484.37,1549 6404.37,1549 ; 6404.37,1779 6404.37,1861 6484.37,1861 6484.37,1779 6404.37,1779

## Silkscreen, mask and mechanical layers (free items; w line width, h text height)
Top Overlay:
  lines w10: 6625,2070 6625,2535 7040,2535 7040,2070 ; 200,20 200,440 665,440 665,20 200,20 ; 1165,20 1165,440 1630,440 1630,20 1165,20 ; 2025,15 2025,435 2490,435 2490,15 2025,15 ; 3015,10 3015,430 3480,430 3480,10 3015,10 ; 3855,15 4320,15 4320,435 3855,435 3855,15 ; 4850,15 4850,435 5315,435 5315,15 4850,15 ; 6625,2065 7040,2065 7040,2530 6625,2530 6625,2065 ; 6630,1500 6630,1965 7040,1965 7040,1500 6630,1500
  text "Power Supply" at 6125,2985 h60
  text "Onboard ADC Section" at 5375,2950 h60
  text "3.3V VDD" at 5905,2895 h60
  text "P3_M2INB" at 4185,2534.69 h75
  text "P3_M1INB" at 4820,2534.69 h75
  text "P2_M2INB" at 455,2529.69 h75
  text "P2_M1INB" at 1090,2529.69 h75
  text "P1_M2INB" at 2315,2529.69 h75
  text "P1_M1INB" at 2950,2529.69 h75
  text "P3_M2PWM" at 4185,2485 h75
  text "P3_M1PWM" at 4820,2485 h75
  text "P2_M2PWM" at 455,2480 h75
  text "P2_M1PWM" at 1090,2480 h75
  text "P1_M2PWM" at 2315,2480 h75
  text "P1_M1PWM" at 2950,2480 h75
  text "P3_M2ENA/B" at 4185,2435 h75
  text "P3_M1ENA/B" at 4820,2435 h75
  text "P2_M2ENA/B" at 455,2430 h75
  text "P2_M1ENA/B" at 1090,2430 h75
  text "P1_M2ENA/B" at 2315,2430 h75
  text "P1_M1ENA/B" at 2950,2430 h75
  text "P3_M2INA" at 4185,2385 h75
  text "P3_M1INA" at 4820,2385 h75
  text "P2_M2INA" at 455,2380 h75
  text "P2_M1INA" at 1090,2380 h75
  text "P1_M2INA" at 2315,2380 h75
  text "P1_M1INA" at 2950,2380 h75
  text "+" at 6545,2345 h100
  text "GND" at 4180,2325 h75
  text "GND" at 4815,2325 h75
  text "GND" at 450,2320 h75
  text "GND" at 1085,2320 h75
  text "GND" at 2310,2320 h75
  text "GND" at 2945,2320 h75
  text "5V VDD" at 6280,2195 h60
  text "-" at 6635,2160 h100 r90
  text "12.0V Rail" at 6635,1985 h100
  text "+" at 6545,1785 h100
  text "-" at 6630,1595 h100 r90
  text "G" at 5600,1535 h393.7
  text "18.5V Rail" at 6635,1425 h100
  text "Thruster Controller" at 5530,1415 h120
  text "For WAVE" at 5540,1330 h120
  text "Designed By" at 5540,1245 h120
  text "Adam J. Vadala-Roth" at 5540,1150 h120
  text "NOTES:" at 5460,960 h120
  text "- Six Brushed DC Motors" at 5455,890 h100
  text "- 12 Amps Continuous  Per CHannel" at 5455,820 h100
  text "- 30 Amp Peak Per Channel" at 5455,740 h100
  text "- Onboard Current Sensing over SPI" at 5455,670 h100
  text "- 18.5 Volt Rail for drivers and FETs" at 5455,595 h100
  text "- 12 Volt Rail for step down to" at 5455,520 h100
  text "3.3/5 Volts for logic" at 5500,445 h100
  text "Channel 1" at 760,30 h100 r90
  text "Channel 6" at 5400,30 h100 r90
  text "Channel 3" at 2570,25 h100 r90
  text "Channel 4" at 3570,25 h100 r90
  text "Channel 2" at 1715,20 h100 r90
  text "Channel 5" at 4405,20 h100 r90
Mechanical 15:
  circle w5: c-3610.6,-3519.7 r0.06
  circle w5: c-3610.6,-3518.6 r0.06
  circle w5: c-3612.6,-3518 r0.06
  circle w5: c-3614.38,-3519.9 r0.06
  circle w5: c1739.94,-1180 r0.06
  lines w5: -3615,-3519.88 ccw(c-3614.88,-3519.88) -3614.88,-3520 -3610.6,-3520 -3610.6,-3519.9 -3610.5,-3519.8 -3610.5,-3518.5 -3610.6,-3518.4 -3610.6,-3517.96 -3610.66,-3517.9 -3614.88,-3517.9 ccw(c-3614.88,-3518.03) -3615,-3518.03 -3615,-3519.88

## Text inside footprints (layer, text, board x,y; h text height)
C3: Top Overlay "+" at 3280,1770 h59.06 r90
C4: Top Overlay "+" at 3500,1770 h59.06 r90
C7: Top Overlay "+" at 2280,1770 h59.06 r90
C8: Top Overlay "+" at 2500,1775 h59.06 r90
C12: Top Overlay "+" at 445,1770 h59.06 r90
C13: Top Overlay "+" at 660,1770 h59.06 r90
C17: Top Overlay "+" at 1425,1775 h59.06 r90
C18: Top Overlay "+" at 1640,1775 h59.06 r90
C22: Top Overlay "+" at 4095,1770 h59.06 r90
C23: Top Overlay "+" at 4310,1770 h59.06 r90
C27: Top Overlay "+" at 5360,1770 h59.06 r90
C28: Top Overlay "+" at 5145,1770 h59.06 r90
C45: Top Overlay "+" at 6530,1925 h59.06 r180
C46: Top Overlay "+" at 6530,1695 h59.06 r180
C49: Top Overlay "+" at 6740,2700 h59.06 r90
C50: Top Overlay "+" at 6975,2700 h59.06 r90
"H-Bridge Pair One Pinning": Top Overlay "10" at 2860,2035 h50 r270; Top Overlay "9" at 2760,2035 h50 r270; Top Overlay "1" at 2760,2575 h50 r270; Top Overlay "2" at 2860,2595 h50 r270
"H-Bridge Pair Three Pinning": Top Overlay "10" at 4725,2035 h50 r270; Top Overlay "9" at 4625,2035 h50 r270; Top Overlay "1" at 4625,2575 h50 r270; Top Overlay "2" at 4725,2595 h50 r270
"H-Bridge Pair Two Pinning": Top Overlay "10" at 985,2035 h50 r270; Top Overlay "9" at 885,2035 h50 r270; Top Overlay "1" at 885,2575 h50 r270; Top Overlay "2" at 985,2595 h50 r270